# Altium PCB ICSL Receiver kecil.PcbDoc
Units mil, origin at the board's own origin, x right, y up, seen from the top; angles counter-clockwise.
Board outline 6000 x 4000 mil, 2 copper layers (Top Layer, Bottom Layer); 5 components, 19 nets, 65 pads, 8 vias.
Unrouted connection lines stored in the file: 1.
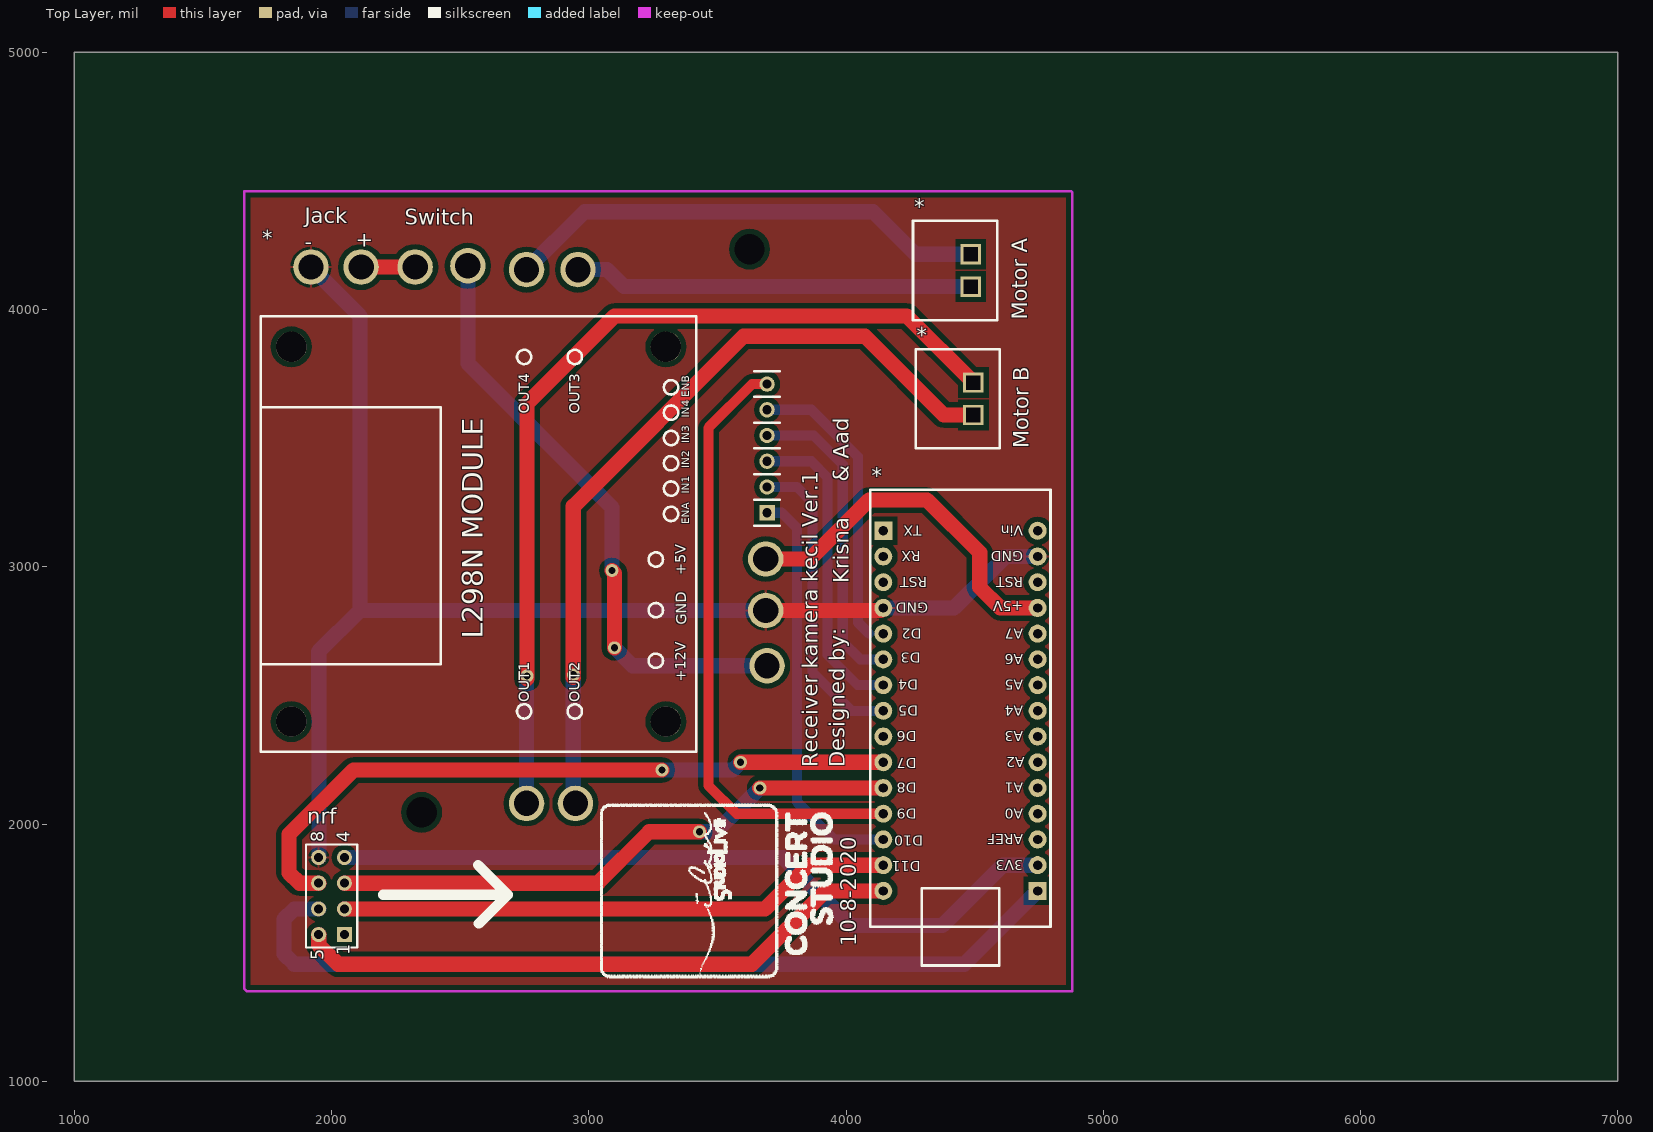
[diagram p0: Top Layer view]
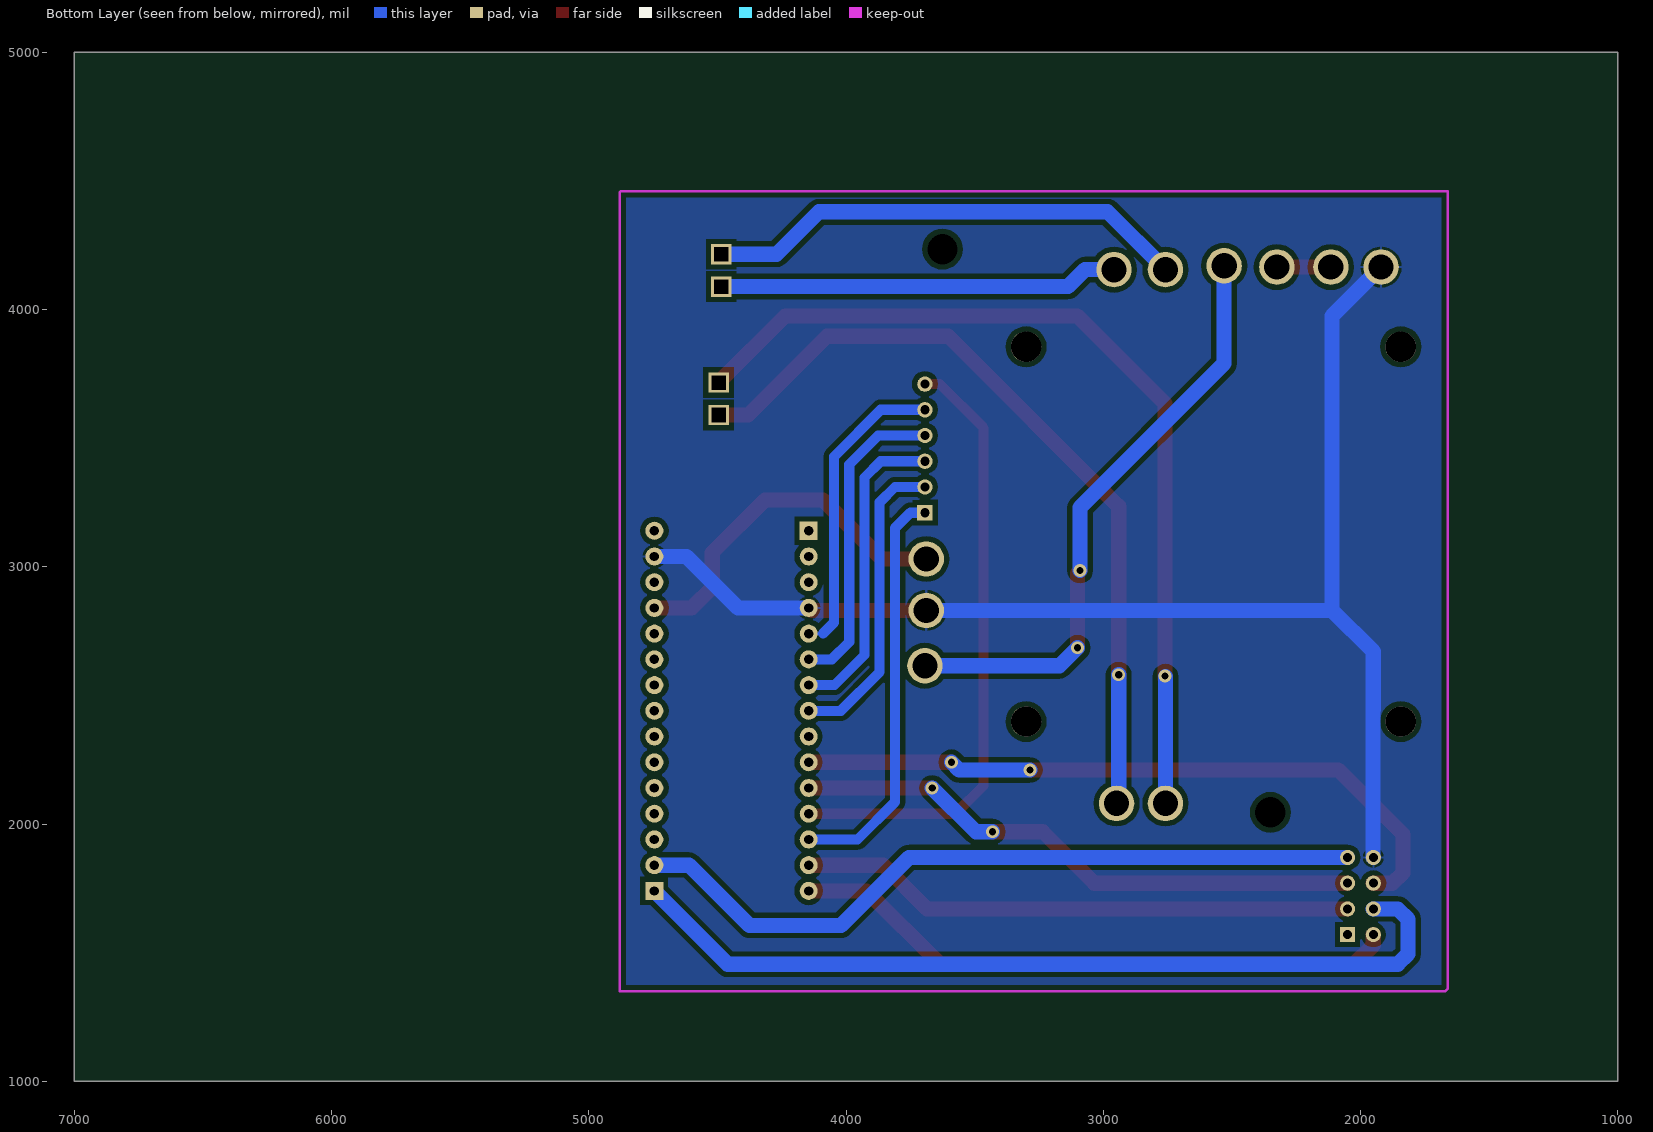
[diagram p1: Bottom Layer view, seen from below]

## Layer stack, top to bottom
Top Solder: solder mask 0.4, Solder Resist, Dk 3.5
Top Layer: signal copper 1.4
Dielectric 1: dielectric 12.6, FR-4, Dk 4.8
Bottom Layer: signal copper 1.4
Bottom Solder: solder mask 0.4, Solder Resist, Dk 3.5

## Board outline
1000,1000 7000,1000 7000,5000 1000,5000

## Design rules (kind name [scope] priority, off if disabled: settings)
Clearance [All] p1: gap=19.68
PolygonConnect [All] p1: connectstyle=Relief reliefconductorwidth=10 reliefentries=4 polygonreliefangle="90 Angle" airgapwidth=10
RoutingVias [All] p1: holewidth=28 width=50 viastyle="Through Hole" minholewidth=28 minwidth=50 maxholewidth=28 maxwidth=50
SolderMaskExpansion [All] p1: expansion=4
UnpouredPolygon [All] p1: allowunpoured=FALSE
Width [All] p1: maxlimit=78.74 minlimit=19.68 preferedwidth=39.37
29 further rules are at their usual default settings.

## Classes and differential pairs
component class "ICSL Receiver kecil": * nrf

## Components (designator, comment, footprint, x,y, rotation, side; value= is the part's Value field where it differs from the comment)
* "Nano" ArduinoNano 4745,1840 r90 top
* "L298N" PCBComponent_1#1 3693.11,2615.2 r90 top
* "Motor 1" PCBComponent_1#2 4589.49,3826.22 r270 top
* "Motor 2" PCBComponent_1#2 4579.49,4325.24 r270 top
nrf "H NRF" HDR2X4_CEN 2050,1570 r90 top

## Footprints (in the part's own frame and the unit in brackets; to place one, negate y for a bottom-side part, rotate by r counter-clockwise, add the part's x,y. Pads: shape width x height; smd on the part's side, far side on the other; paste and mask are expansions set on the pad)
ArduinoNano [mil]
  rect 70x70 hole 36: 0(-100,0) 15(1300,600)
  round 70 hole 36: 1(0,0) 2(100,0) 3(200,0) 4(300,0) 5(400,0) 6(500,0) 7(600,0) 8(700,0) 9(800,0) 10(900,0) 11(1000,0) 12(1100,0) 13(1200,0) 14(1300,0) 16(1200,600) 17(1100,600) 18(1000,600) 19(900,600) 20(800,600) 21(700,600) 22(600,600) 23(500,600) 24(400,600) 25(300,600) 26(200,600) 27(100,600) 28(0,600) 29(-100,600)
  silkscreen extent -390,-50 1460,650
HDR2X4_CEN [mm] "Connector; Header; 4x2 Position"
  rect 1.5x1.5 hole 0.9: 1(0,0)
  round 1.5 hole 0.9: 2(2.54,0) 3(5.08,0) 4(7.62,0) 5(0,2.54) 6(2.54,2.54) 7(5.08,2.54) 8(7.62,2.54)
  silkscreen extent -1.27,-1.27 8.89,3.81
PCBComponent_1#1 [mil]
  round 137.8 hole 98.43: 1(0,0) 2(215,5) 3(415,5) 10(-535,935) 11(-535,745) 12(1540,735) 13(1540,935)
  rect 60x60 hole 36: 4(595,0)
  round 60 hole 36: 5(695,0) 6(795,0) 7(895,0) 8(995,0) 9(1095,0)
  round 118.11 hole 118.11 unplated: ""(-216.89,1849.8) ""(-216.89,393.11) ""(1239.8,393.11) ""(1239.8,1849.8)
  silkscreen extent -335,-50 1358,1968
PCBComponent_1#2 [mil]
  rect 78.74x78.74 hole 55.12 square: 1(110.24,-94.49) 2(236.22,-94.49)
  silkscreen extent -20,-319 366,8

## Part data
* * * *: library part Component_1
nrf: library part "Header 4X2A", "Header, 4-Pin, Dual row"

## Free pads (board coordinates)
  round 137.8 hole 98.43: 8(2115,4165) 9(1920,4165) SW1(2325,4165) SW2(2530,4170)
  round 60 hole 118.11: 10(2350,2045) 10(3625,4235)

## Via types
v1: diameter 50, hole 28, Top Layer to Bottom Layer, 8 vias

## Nets (pads, with @x,y where several pads share a name; then routed paths per layer and width w, separated by ;. In a path a pad name is that pad's centre, name@x,y a point inside that pad or via, vN(x,y) a via of type N, cw(c..) or ccw(c..) an arc to the next point about the centre after c; other vN are vias at no path point)
3.3V: *.1@4745,1840 nrf.4 | length 2902.1
  Bottom Layer w59.06: nrf.4 3755,1870 4020,1605 4375,1605 4610,1840 *.1@4745,1840
5V: *.3@3688.11,3030.2 *.11@4745,2840 | length 1405.1
  Top Layer w59.06: *.3@3688.11,3030.2 3860.2,3030.2 4090,3260 4315,3260 4520,3055 4520,2920 4600,2840 *.11@4745,2840
12V: *.1@3693.11,2615.2 pad.8 pad.SW1 pad.SW2 | length 2553.1
  Top Layer w59.06: pad.8 pad.SW1 ; v1(3090,2985) 3100,2975 v1(3100,2685)
  Bottom Layer w59.06: pad.SW2 2530,3790 3090,3230 v1(3090,2985) ; v1(3100,2685) 3169.8,2615.2 *.1@3693.11,2615.2
D2: *.8@3693.11,3610.2 *.19 | length 1190.2
  Bottom Layer w10: 4090,2740 *.19
  Bottom Layer w39.37: *.8@3693.11,3610.2 3864.8,3610.2 4046.22,3428.78 4046.22,2783.78 4090,2740
D3: *.7@3693.11,3510.2 *.20 | length 1216.5
  Bottom Layer w39.37: *.7@3693.11,3510.2 3874.8,3510.2 3987.17,3397.83 3987.17,2707.83 4055,2640 *.20
D4: *.6@3693.11,3410.2 *.21 | length 1216.5
  Bottom Layer w39.37: *.6@3693.11,3410.2 3864.8,3410.2 3928.11,3346.89 3928.11,2656.89 4045,2540 *.21
D5: *.5@3693.11,3310.2 *.22 | length 1199
  Bottom Layer w39.37: *.5@3693.11,3310.2 3809.8,3310.2 3869.06,3250.94 3869.06,2590.94 4020,2440 *.22
D7: *.24 nrf.7 | length 2707.5
  Top Layer w59.06: nrf.7 1875,1770 1835,1810 1835,1960 2085,2210 v1(3285,2210) ; v1(3590,2240) *.24
  Bottom Layer w59.06: v1(3285,2210) 3560,2210 v1(3590,2240)
D8: *.25 nrf.3 | length 2248.3
  Top Layer w59.06: nrf.3 3035,1770 3235,1970 v1(3430,1970) ; v1(3665,2140) *.25
  Bottom Layer w59.06: v1(3430,1970) 3495,1970 v1(3665,2140)
D9: *.9@3693.11,3710.2 *.26 | length 2414.2
  Top Layer w39.37: *.9@3693.11,3710.2 3635.2,3710.2 3465,3540 3465,2150 3575,2040 *.26
D10: *.4@3693.11,3210.2 *.27 | length 1601.9
  Bottom Layer w39.37: *.4@3693.11,3210.2 3749.8,3210.2 3810,3150 3810,2085 3955,1940 *.27
D11: *.28 nrf.2 | length 2165.4
  Top Layer w59.06: nrf.2 3685,1670 3855,1840 *.28
D12: *.29 nrf.5 | length 2384.1
  Top Layer w59.06: nrf.5 1950,1530 2025,1455 3635,1455 3920,1740 *.29
D13: *.0 nrf.6 | length 3351.2
  Bottom Layer w59.06: nrf.6 1855,1670 1815,1630 1815,1495 1855,1455 4460,1455 *.0
GND: *.2@3688.11,2830.2 *.13@4745,3040 *.18 nrf.8 pad.9 | length 5163.1
  Top Layer w19.68: *.18@4135.2,2830.2 *.18
  Top Layer w59.06: *.2@3688.11,2830.2 *.18@4135.2,2830.2
  Bottom Layer w59.06: pad.9 2110.2,3974.8 2110.2,2830.2 ; nrf.8 1951.58,1871.58 1951.58,2443.16 1950,2444.73 1950,2670 2110.2,2830.2 ; *.2@3688.11,2830.2 2110.2,2830.2 ; *.18 4420,2840 4620,3040 *.13@4745,3040
OUT1: *.1@4495,3715.98 *.10@2758.11,2080.2 | length 3546
  Top Layer w59.06: v1@2760,2565 v1(2760,2575) 2760,3635 3100,3975 4235.98,3975 *.1@4495,3715.98
  Bottom Layer w59.06: *.10@2758.11,2080.2 v1@2758.11,2573.11
OUT2: *.2@4495,3590 *.11@2948.11,2080.2 | length 3120.6
  Top Layer w59.06: v1@2940,2570 v1(2940,2580) 2940,3235 3601.26,3896.26 4073.74,3896.26 4380,3590 *.2@4495,3590
  Bottom Layer w59.06: *.11@2940,2088.31 v1(2940,2580) ; *.11@2948.11,2080.2 *.11@2948.11,2088.31
OUT3: *.2@4485,4089.02 *.12@2958.11,4155.2 | length 1554.3
  Bottom Layer w59.06: *.12@2958.11,4155.2 3071.03,4155.2 3137.21,4089.02 *.2@4485,4089.02
OUT4: *.1@4485,4215 *.13@2758.11,4155.2 | length 1888.3
  Bottom Layer w59.06: *.13@2758.11,4155.2 2982.91,4380 4105,4380 4270,4215 *.1@4485,4215
pads on no net: *. *.2@4745,1940 *.3@4745,2040 *.4@4745,2140 *.5@4745,2240 *.6@4745,2340 *.7@4745,2440 *.8@4745,2540 *.9@4745,2640 *.10@4745,2740 *.12@4745,2940 *.14 *.15 *.16 *.17 *.23 nrf.1

## Polygon pours and split planes (outlines as drawn)
GND on Top Layer "Top Layer-No Net" (solid, pour order 6): 1660,4460 1660,1360 1670,1350 4880,1350 4875,1355 4875,4460 1660,4460
GND on Top Layer "Top Layer-No Net" (solid, pour order 2): 1660,4460 1660,1360 1670,1350 4880,1350 4880,4455 4877.5,4457.5 4875,4460 1660,4460
GND on Bottom Layer "Top Layer-No Net" (solid, pour order 4): 1660,4460 1660,1360 1670,1350 4880,1350 4880,4455 4875,4460 1660,4460

## Keep-outs
Keep-Out Layer:
  lines w10: 1660,1360 1670,1350 4880,1350 4880,4455 4875,4460 1660,4460 1660,1360

## Silkscreen, mask and mechanical layers (free items; w line width, h text height)
Top Overlay:
  drawing of 1447 lines, arcs and shapes, not listed
  text "Jack" at 1895,4335 h60
  text "Switch" at 2285,4330 h60
  text "+" at 2095,4245 h60
  text "-" at 1895,4235 h60
  text "Motor A" at 4705,3960 h60 r90
  text "Motor B" at 4710,3460 h60 r90
  text "& Aad" at 4010,3330 h60 r90
  text "Krisna" at 4010,2935 h60 r90
  text "Receiver kamera kecil Ver.1" at 3890,2220 h60 r90
  text "Designed by:" at 3995,2220 h60 r90
  text "10-8-2020" at 4040,1525 h60 r90

## Dimensions
2350,2045 to 1670,1350 on Mechanical 1
2350,2045 to 1660,1360 on Mechanical 1
3625,4235 to 4880,4455 on Mechanical 1
3625,4235 to 4875,4460 on Mechanical 1
4880,1350 to 4875,4460 on Mechanical 1
1660,4460 to 4880,4455 on Mechanical 1

## Text inside footprints (layer, text, board x,y; h text height)
*: Top Overlay "ENB" at 3389.97,3658.12 h29.53 r90; Top Overlay "IN4" at 3389.96,3579.44 h29.53 r90; Top Overlay "IN3" at 3389.86,3481.03 h29.53 r90; Top Overlay "IN2" at 3389.96,3382.55 h29.53 r90; Top Overlay "IN1" at 3389.96,3284.12 h29.53 r90; Top Overlay "OUT3" at 2978.17,3594.98 h70.87 r90; Top Overlay "OUT4" at 2781.32,3594.98 h70.87 r90; Top Overlay "OUT1" at 2781.35,2472.95 h70.87 r90; Top Overlay "OUT2" at 2978.2,2472.96 h70.87 r90; Top Overlay "+5V" at 3390.57,2966.48 h70.87 r90; Top Overlay "GND" at 3393.77,2775.55 h70.87 r91; Top Overlay "+12V" at 3391.57,2553.09 h70.87 r90; Top Overlay "L298N MODULE" at 2588.8,2720.2 h80 r90; Top Overlay "ENA" at 3389.92,3166.06 h29.53 r90
*: Top Overlay "D11" at 4290,1855 h40 r180; Top Overlay "D10" at 4300,1955 h40 r180; Top Overlay "D9" at 4275,2060 h40 r180; Top Overlay "D8" at 4275,2160 h40 r180; Top Overlay "D7" at 4275,2255 h40 r180; Top Overlay "D6" at 4275,2360 h40 r180; Top Overlay "D5" at 4280,2460 h40 r180; Top Overlay "D4" at 4280,2560 h40 r180; Top Overlay "D3" at 4290,2665 h40 r180; Top Overlay "D2" at 4295,2760 h40 r180; Top Overlay "GND" at 4320,2860 h40 r180; Top Overlay "RST" at 4315,2960 h40 r180; Top Overlay "RX" at 4290,3060 h40 r180; Top Overlay "TX" at 4295,3160 h40 r180; Top Overlay "Vin" at 4690,3160 h40 r180; Top Overlay "GND" at 4690,3060 h40 r180; Top Overlay "RST" at 4690,2960 h40 r180; Top Overlay "+5V" at 4690,2865 h40 r180; Top Overlay "A7" at 4690,2760 h40 r180; Top Overlay "A6" at 4690,2660 h40 r180; Top Overlay "A5" at 4690,2560 h40 r180; Top Overlay "A4" at 4690,2460 h40 r180; Top Overlay "A3" at 4690,2360 h40 r180; Top Overlay "A2" at 4695,2260 h40 r180; Top Overlay "A1" at 4690,2160 h40 r180; Top Overlay "A0" at 4690,2060 h40 r180; Top Overlay "AREF" at 4690,1960 h40 r180; Top Overlay "3V3" at 4690,1860 h40 r180
nrf: Top Overlay "5" at 1970,1470 h50 r90; Top Overlay "1" at 2070,1490 h50 r90; Top Overlay "4" at 2070,1930 h50 r90; Top Overlay "8" at 1970,1930 h50 r90